# Altium PCB Night_light.PcbDoc
Units mil, origin at the board's own origin, x right, y up, seen from the top; angles counter-clockwise.
Board outline 2340.03 x 2371.94 mil, 2 copper layers (Top Layer, Bottom Layer); 32 components, 21 nets, 84 pads, 36 vias.
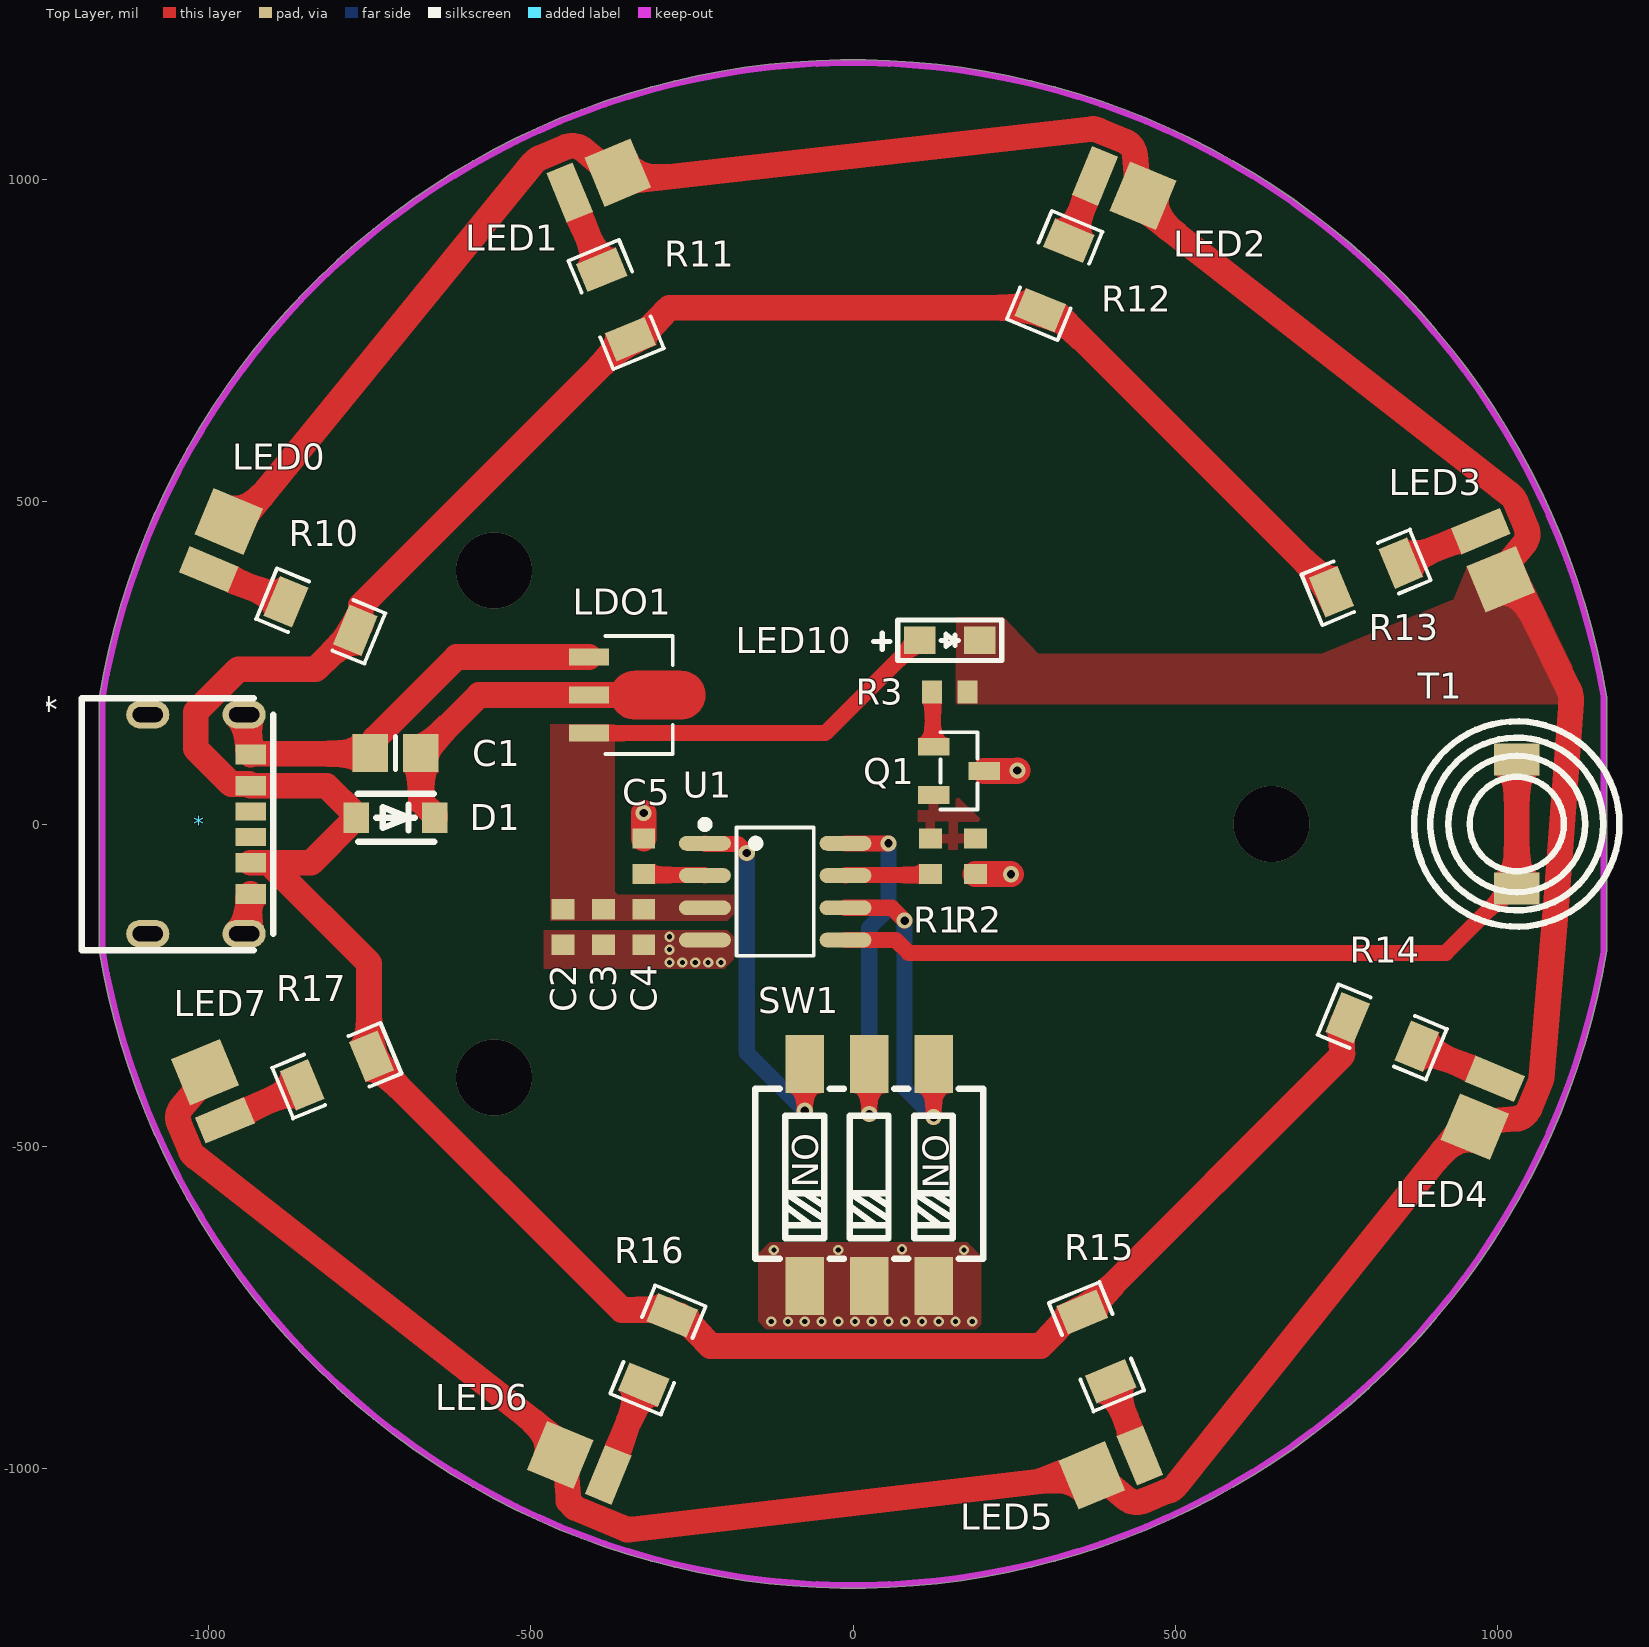
[diagram p0: Top Layer view]
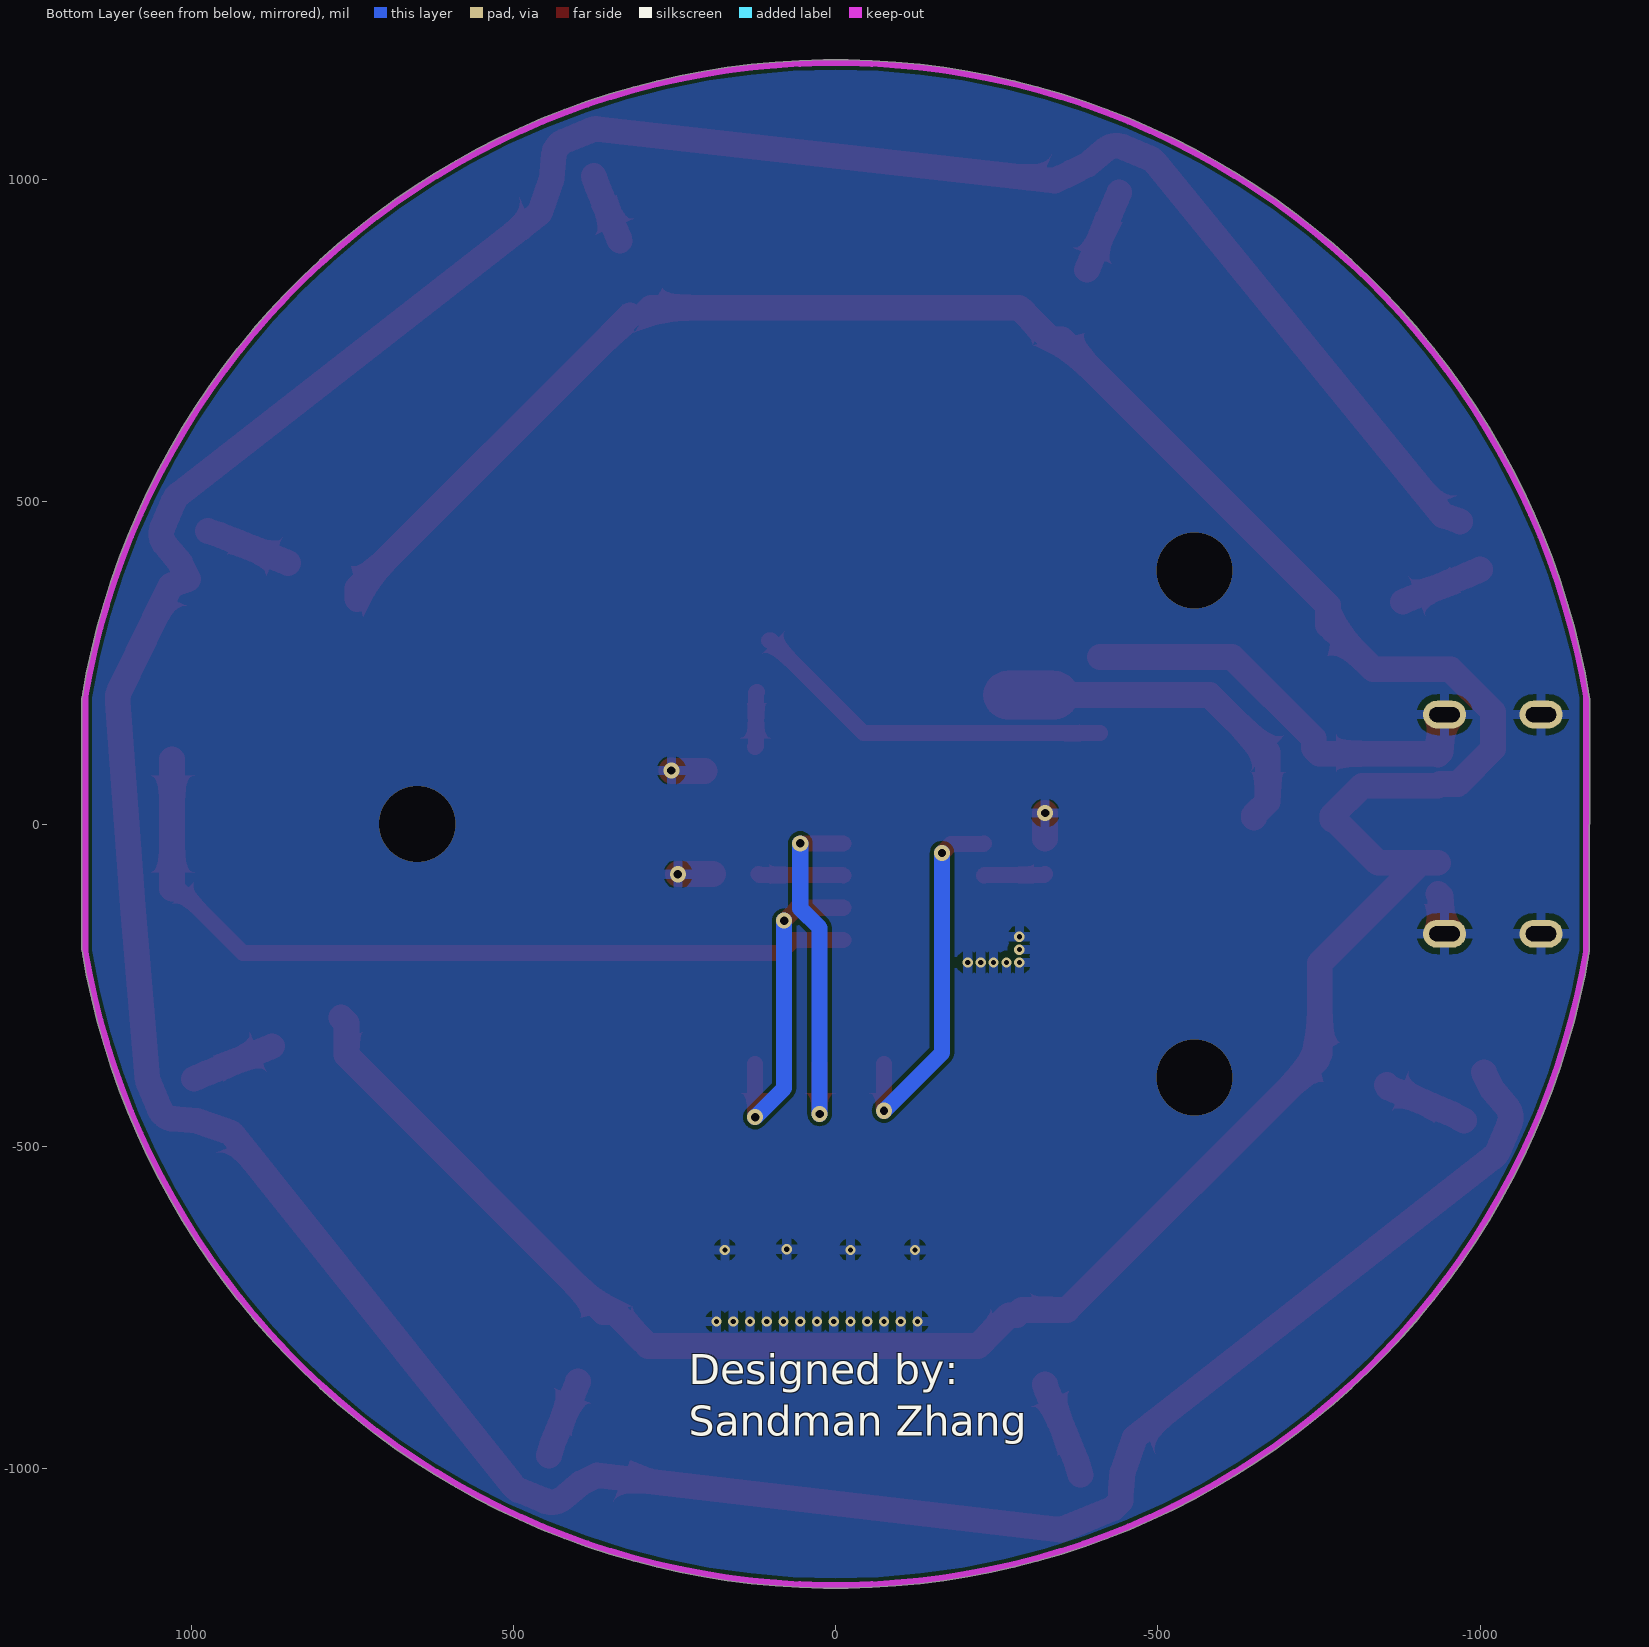
[diagram p1: Bottom Layer view, seen from below]

## Layer stack, top to bottom
Top Solder: solder mask 0.4, Solder Resist, Dk 3.5
Top Layer: signal copper 1.4
Dielectric 1: dielectric 12.6, FR-4, Dk 4.8
Bottom Layer: signal copper 1.4
Bottom Solder: solder mask 0.4, Solder Resist, Dk 3.5

## Board outline
-1169.67,-196.82 ccw(c0,0) 1169.67,-196.82 1170.02,-195 1170.02,195 1169.67,196.82 ccw(c0,0) -1169.67,196.82 -1170.01,195

## Design rules (kind name [scope] priority, off if disabled: settings)
Clearance [All] p1: gap=6 ignorepadtopadclearanceinfootprint=FALSE
HoleSize [All] p1: absolutevalues=TRUE maxlimit=200 minlimit=1 maxpercent=80.000 minpercent=20.000
MinimumSolderMaskSliver [All] p1: minsoldermaskwidth=6
PlaneConnect [All] p1: planeconnectstyle=Relief reliefexpansion=20 reliefentries=4 reliefconductorwidth=15 reliefairgap=10
PolygonConnect [All] p1: connectstyle=Relief reliefconductorwidth=15 reliefentries=4 polygonreliefangle="90 Angle" airgapwidth=10
RoutingVias [All] p1: holewidth=16 width=32 viastyle="Through Hole" minholewidth=8 minwidth=16 maxholewidth=28 maxwidth=56
SilkToSilkClearance [All] p1: silktosilkclearance=0
SilkToSolderMaskClearance [IsPad] p1: minsilkscreentomaskgap=0 clearancetoexposedcopper=TRUE
SolderMaskExpansion [All] p1: expansion=4 istentingtop=FALSE
Width Width_GND [InNet('GND')] p1: maxlimit=60 minlimit=25 preferedwidth=40 minimp=50.000000 maximp=50.000000 favimp=50.000000
Width Width_Power [InNet('+5')] p2: maxlimit=60 minlimit=25 preferedwidth=40 minimp=50.000000 maximp=50.000000 favimp=50.000000
Width Width_Power_1 [InNet('VCC')] p3: maxlimit=60 minlimit=25 preferedwidth=40 minimp=50.000000 maximp=50.000000 favimp=50.000000
Width [All] p4: maxlimit=40 minlimit=10 preferedwidth=25 minimp=50.000000 maximp=50.000000 favimp=50.000000
25 further rules are at their usual default settings.

## Components (designator, comment, footprint, x,y, rotation, side; value= is the part's Value field where it differs from the comment)
* "USB-C 6P" "USB-C 6P" -945,169.76 r270 top
C1 "Cap" 6-0805_M -710,110 r0 top value=100pF
C2 "Cap" 1608[0603] -450,-160 r90 top value=100pF
C3 "Cap" 1608[0603] -387.5,-160 r90 top value=100pF
C4 "Cap" 1608[0603] -325,-160 r90 top value=100pF
C5 "Cap" 1608[0603] -325,-50 r270 top value=100pF
D1 "Diode" SOD-123 -771.02,10 r0 top
LDO1 "7150-1" SOT-89 -410,259.05 r180 top
LED0 "2835LED" 2835LED -1000,395 r67.5 top
LED1 "2835LED" 2835LED -440,980 r22.5 top
LED2 "2835LED" 2835LED 375.43,1005.89 r337.5 top
LED3 "2835LED" 2835LED 974.11,454.57 r292.5 top
LED4 "2835LED" 2835LED 995.89,-395.43 r247.5 top
LED5 "2835LED" 2835LED 445,-980 r202.5 top
LED6 "2835LED" 2835LED -380,-1010 r157.5 top
LED7 "2835LED" 2835LED -975,-460 r112.5 top
LED10 "LED" LED 150,285 r180 top
Q1 "NPN" SOT23 125,119.8 r180 top
R1 "101" 1608[0603] 120,-50 r90 top
R2 "103" 1608[0603] 190,-50 r90 top
R3 "102" 1608[0603] 150,205 r180 top
R10 "Res" R1206 -826.21,322.72 r157.5 top
R11 "Res" R1206 -367.72,806.21 r112.5 top
R12 "Res" R1206 312.72,851.21 r67.5 top
R13 "Res" R1206 796.21,382.72 r22.5 top
R14 "Res" R1206 821.21,-322.72 r337.5 top
R15 "Res" R1206 377.72,-811.21 r292.5 top
R16 "Res" R1206 -302.72,-816.21 r247.5 top
R17 "Res" R1206 -801.21,-382.72 r202.5 top
SW1 "SD03H0SB" SW-SMD_3 25,-545 r0 top
T1 "Touch_spring" Touch_spring2 1030,0 r90 top
U1 "LED_controller" SOP8 -230,-30 r270 top

## Footprints (in the part's own frame and the unit in brackets; to place one, negate y for a bottom-side part, rotate by r counter-clockwise, add the part's x,y. Pads: shape width x height; smd on the part's side, far side on the other; paste and mask are expansions set on the pad)
6-0805_M [mm] "Chip Resistor, Body 2.0x1.2mm, IPC Low Density"
  rect 1.4x1.5 smd: 1(-1,0) 2(1,0)
  silkscreen extent 0,-0.65 0,0.65, body extent -1.07,-0.7 1.07,0.7, height 0.7
1608[0603] [mm] "Chip Capacitor, Body 1.6x0.8mm, IPC High Density"
  rect 0.8x0.9 smd: 1(-0.7,0) 2(0.7,0)
  body extent -0.87,-0.48 0.87,0.48, height 1.3
2835LED [mm]
  rect 1.12x2.1 smd: 1(0,0)
  rect 1.98x2.1 smd: 2(2.05,0)
LED [mil]
  rect 49x43 smd: 1(46.26,0) 2(-46.26,0)
  silkscreen extent -81,-31 118,31
R1206 [mil]
  rect 47.54x66.97 smd: 1(-58.22,0) 2(58.22,0)
  silkscreen extent -91,-42 91,42
SOD-123 [mm]
  rect 1x1.2 smd: 1(0,0) 2(3.1,0)
  silkscreen extent 0.06,-0.95 3.07,0.93
SOP8 [mm]
  oval 0.588x2.045 smd: 1(0,0) 2(1.27,0) 3(2.54,0) 4(3.81,0) 5(3.81,5.545) 6(2.54,5.545) 7(1.27,5.545) 8(0,5.545)
  silkscreen extent -0.9,-0.15 4.43,4.29
SOT23 [mm]
  rect 1.25x0.7 smd: 1(0,0) 2(0,1.9) 3(-2,0.95)
  silkscreen extent -1.73,-0.58 -0.27,2.48
SOT-89 [mm]
  rect 1.575x0.672 smd: 1(0,0) 2(0,1.5) 3(0,3)
  Top Layer region: -3.644,2.448 -1.79,2.448 -1.745,2.447 -1.701,2.444 -1.657,2.439 -1.613,2.432 -1.569,2.422 -1.526,2.411 -1.484,2.398 -1.442,2.382 -1.401,2.365 -1.361,2.346 -1.321,2.325 -1.283,2.302 -1.246,2.277 -1.21,2.251 -1.176,2.223 -1.142,2.193 -1.11,2.162 -1.08,2.13 -1.051,2.096 -1.024,2.06 -0.998,2.024 -0.975,1.986 -0.953,1.947 -0.933,1.908 -0.914,1.828 0.787,1.828 0.787,1.168 -0.914,1.168 -0.933,1.089 -0.953,1.049 -0.975,1.011 -0.998,0.973 -1.024,0.936 -1.051,0.901 -1.08,0.867 -1.11,0.835 -1.142,0.803 -1.176,0.774 -1.21,0.746 -1.246,0.719 -1.283,0.695 -1.321,0.672 -1.361,0.651 -1.401,0.632 -1.442,0.614 -1.484,0.599 -1.526,0.586 -1.569,0.574 -1.613,0.565 -1.657,0.558 -1.701,0.553 -1.745,0.549 -1.79,0.548 -3.644,0.548 -3.689,0.549 -3.733,0.553 -3.777,0.558 -3.821,0.565 -3.865,0.574 -3.908,0.586 -3.95,0.599 -3.992,0.614 -4.033,0.632 -4.073,0.651 -4.113,0.672 -4.151,0.695 -4.188,0.719 -4.224,0.746 -4.259,0.774 -4.292,0.803 -4.324,0.835 -4.354,0.867 -4.383,0.901 -4.41,0.936 -4.436,0.973 -4.459,1.011 -4.481,1.049 -4.501,1.089 -4.52,1.13 -4.536,1.171 -4.55,1.213 -4.563,1.256 -4.573,1.299 -4.581,1.343 -4.588,1.387 -4.592,1.432 -4.594,1.476 -4.594,1.521 -4.592,1.565 -4.588,1.609 -4.581,1.654 -4.573,1.697 -4.563,1.741 -4.55,1.783 -4.536,1.826 -4.52,1.867 -4.501,1.908 -4.481,1.947 -4.459,1.986 -4.436,2.024 -4.41,2.06 -4.383,2.096 -4.354,2.13 -4.324,2.162 -4.292,2.193 -4.259,2.223 -4.224,2.251 -4.188,2.277 -4.151,2.302 -4.113,2.325 -4.073,2.346 -4.033,2.365 -3.992,2.382 -3.95,2.398 -3.908,2.411 -3.865,2.422 -3.821,2.432 -3.777,2.439 -3.733,2.444 -3.689,2.447
  silkscreen extent -3.31,-0.83 -0.65,3.83
SW-SMD_3 [mil]
  rect 60x90 smd: 1(-99.99,-172.25) 2(0.01,-172.25) 3(100.01,-172.25) 4(100.01,172.25) 5(0.01,172.25) 6(-99.99,172.25)
  silkscreen extent -177,-130 177,134
Touch_spring2 [mil]
  rect 50x70 smd: 1(-100,0) 1(100,0)
  silkscreen extent -159,-159 159,159
"USB-C 6P" [mm]
  rect 0.8x1.2 smd: 1(1.57,0.254) 6(7.07,0.254)
  rect 0.76x1.2 smd: 2(2.8,0.254) 5(5.84,0.254)
  rect 0.7x1.2 smd: 3(3.82,0.254) 4(4.82,0.254)
  oval 1.1x1.7 hole 1.2 slot 0.6 at 0 deg: 7(0,0) 8(0,-3.8) 9(8.64,0) 10(8.64,-3.8)
  silkscreen extent -0.65,-6.4 9.29,1.14, body extent -0.13,-6.62 8.81,1.28, height 3.19

## Part data
C1 C2 C3 C4 C5: "Capacitor", LatestRevisionDate=17-Jul-2002, LatestRevisionNote="Re-released for DXP Platform.", PackageDescription="Radial Cap, Thru-Hole; 2 Leads; 0.3 in Pin Spacing", PackageReference=RAD-0.3, Published=8-Jun-2000, Publisher="Altium Limited"
D1: "Default Diode", Code_JEDEC=DO-214-AB, LatestRevisionDate=17-Jul-2002, LatestRevisionNote="Re-released for DXP Platform.", PackageDescription="DO-214-AB/SMC; 2 C-Bend Leads; Body 7.9 x 5.9 mm, inc. leads (LxW)", PackageReference=SMC, PackageVersion=Sep-1996, Published=8-Jun-2000, Publisher="Altium Limited"
LED10: "Typical INFRARED GaAs LED", LatestRevisionDate=08-Jul-2005, LatestRevisionNote="Mech Layer 1 removed.", PackageDescription="LED; 2 Leads", PackageReference=LED-0, Published=8-Jun-2000, Publisher="Altium Limited"
Q1: "NPN Bipolar Transistor", Code_JEDEC=TO-226-AA, LatestRevisionDate=17-Jul-2002, LatestRevisionNote="Re-released for DXP Platform.", PackageDescription="TO, Flat Index; 3 In-Line, Axial Leads; Body Dia. 4.8mm; Leads 0.55 x 0.51 mm (max)", PackageReference=TO-226-AA, Published=8-Jun-2000, Publisher="Altium Limited"
R1 R2 R3: library part Res, "Resistor", LatestRevisionDate=17-Jul-2002, LatestRevisionNote="Re-released for DXP Platform.", PackageDescription="Axial Device, Thru-Hole; 2 Leads; 0.4 in Pin Spacing", PackageReference=AXIAL-0.4, Published=8-Jun-2000, Publisher="Altium Limited"
R10 R11 R12 R13 R14 R15 R16 R17: "Resistor", LatestRevisionDate=17-Jul-2002, LatestRevisionNote="Re-released for DXP Platform.", PackageDescription="Axial Device, Thru-Hole; 2 Leads; 0.4 in Pin Spacing", PackageReference=AXIAL-0.4, Published=8-Jun-2000, Publisher="Altium Limited"
SW1: library part "SW Dial-3"

## Via types
v1: diameter 16, hole 8, Top Layer to Bottom Layer, 24 vias
v2: diameter 25, hole 13, Top Layer to Bottom Layer, 9 vias
v3: diameter 118.11, hole 118.11, Top Layer to Bottom Layer, 3 vias

## Nets (pads, with @x,y where several pads share a name; then routed paths per layer and width w, separated by ;. In a path a pad name is that pad's centre, name@x,y a point inside that pad or via, vN(x,y) a via of type N, cw(c..) or ccw(c..) an arc to the next point about the centre after c; other vN are vias at no path point)
+5: C2.2 C3.2 C4.2 LDO1.3 LED10.1 U1.3 | length 573.4
  Top Layer w25: LDO1.3 -43.31,140.95 100.74,285 LED10.1
Ctrl: R1.1 U1.7 | length 132.7
  Top Layer w25: U1.7 -10.77,-79.07 118.48,-79.07 R1.1
GND: *.1 *.6 *.7 *.8 *.9 *.10 C1.1 C2.1 C3.1 C4.1 C5.1 LDO1.1 Q1.3 R2.1 SW1.1 SW1.2 SW1.3 U1.4 | length 880.2
  Top Layer w40: *.9 -940.15,-170.39 -938.62,-168.87 -938.62,-112.2 *.6 ; *.7 -940.15,169.76 -938.62,168.24 -938.62,111.57 *.1 -933.98,108.98 -750.39,108.98 C1.1 -741.81,117.56 -741.81,132.68 -615.43,259.05 LDO1.1 ; C5.1 v2(-325,17) ; R2.1 244.56,-77.56 v2(245,-78) ; Q1.3 254.4,82.4 v2(255,83)
  other v1: -127,-772 -101,-772 -75,-772 -49,-772 -23,-772 3,-772 29,-772 55,-772 81,-772 107,-772 133,-772 159,-772 185,-772 -123,-661 -23,-661 172,-661 76,-660 -285,-215 -265,-215 -245,-215 -225,-215 -205,-215 -285,-195 -285,-175
  other v3: -557,-393.7 649.5,0 -557,393.7
IN+: C1.2 D1.2 LDO1.2 | length 478
  Top Layer w40: D1.2 -648.98,13.31 -670.63,34.96 C1.2 -670.63,111.97 -663.07,119.53 -661.1,119.53 -580.63,200 LDO1.2 -340,200
LED_ctrl: LED0.2 LED1.2 LED2.2 LED3.2 LED4.2 LED5.2 LED6.2 LED7.2 LED10.2 R3.1 | length 6289.1
  Top Layer w40: LED7.2 -1018.34,-411.13 -1041.53,-438.72 ccw(c-1021.63,-455.45) -1045.65,-465.4 -1028.78,-506.14 ccw(c-1004.75,-496.19) -1020.77,-516.67 -463.93,-952.14 LED6.2 -445.2,-1006.09 -442.83,-1033.52 -442.19,-1040.88 -442.19,-1050.52 -430.92,-1061.8 -350.76,-1095 -347.54,-1095 350.85,-1013.18 LED5.2 396.13,-1023.34 423.72,-1046.53 ccw(c440.45,-1026.63) 450.39,-1050.65 485.03,-1036.3 492.6,-1033.78 495.92,-1031.8 501.62,-1026.09 503.73,-1023.2 938.02,-479.37 LED4.2 991.98,-460.63 1027.88,-457.53 ccw(c1025.64,-431.62) 1049.66,-441.57 1066.54,-400.84 ccw(c1042.51,-390.89) 1068.42,-393.08 1090.91,-127.19 ccw(c1065,-125) 1090.93,-126.92 1114.35,188.94 ccw(c1074.46,191.9) 1110.46,209.33 1110.43,209.4 1031.98,370.63 LED3.2 1017.45,405.7 1040.64,433.28 ccw(c1020.74,450.02) 1044.76,459.97 1027.89,500.7 ccw(c1003.87,490.75) 1019.85,511.26 459.37,948.02 LED2.2 440.63,1001.98 437.53,1037.88 ccw(c411.62,1035.64) 421.57,1059.66 380.84,1076.54 ccw(c370.89,1052.51) 367.97,1078.35 -339.74,998.43 LED1.2 -391.13,1023.34 -418.72,1046.53 ccw(c-435.45,1026.63) -445.4,1050.65 -486.14,1033.78 ccw(c-476.19,1009.75) -496.35,1026.18 -942.14,478.93 LED0.2
NetC5_2: C5.2 U1.2 | length 96
  Top Layer w25: C5.2 -323.48,-79.07 -230.93,-79.07 U1.2
NetLED0_1: LED0.1 R10.2 | length 130
  Top Layer w40: LED0.1 -980.39,386.59 -883.48,346.45 R10.2
NetLED1_1: LED1.1 R11.2 | length 130
  Top Layer w40: LED1.1 -431.59,960.39 -391.45,863.48 R11.2
NetLED2_1: LED2.1 R12.2 | length 108.7
  Top Layer w40: R12.2 336.4,908.5 368.38,985.71 LED2.1
NetLED3_1: LED3.1 R13.2 | length 133.7
  Top Layer w40: R13.2 853.5,406.4 953.77,447.93 LED3.1
NetLED4_1: LED4.1 R14.2 | length 131
  Top Layer w40: R14.2 878.48,-346.45 976.3,-386.97 LED4.1
NetLED5_1: LED5.1 R15.2 | length 123.6
  Top Layer w40: R15.2 401.08,-868.63 438.72,-959.5 LED5.1
NetLED6_1: LED6.1 R16.2 | length 150.6
  Top Layer w40: LED6.1 -373.72,-989.5 -325.78,-873.76 R16.2
NetLED7_1: LED7.1 R17.2 | length 133
  Top Layer w40: LED7.1 -956.07,-449.94 -857.39,-409.07 R17.2
NetQ1_1: Q1.1 R3.2 | length 86.3
  Top Layer w25: R3.2 123.72,203.72 123.72,121.08 Q1.1
NetQ1_2: Q1.2 R1.2 R2.2
SB1: SW1.6 U1.1 | length 580.7
  Top Layer w25: U1.1 -229.07,-30.93 -179.07,-30.93 v2(-165,-45) ; v2(-75,-445) SW1.6
  Bottom Layer w25: v2(-165,-45) -165,-355 v2(-75,-445)
SB2: SW1.5 U1.8 | length 576.4
  Top Layer w25: U1.8 v2(55,-30) ; v2(25,-450) SW1.5@25,-372.75
  Bottom Layer w25: v2(25,-450) 25,-161.16 55,-131.16 v2(55,-30)
SB3: SW1.4 U1.6 | length 505.9
  Top Layer w25: U1.6 60,-130 v2(80,-150) ; v2(125,-455) SW1.4
  Bottom Layer w25: v2(80,-150) 80,-410 v2(125,-455)
Touch: T1.1 U1.5 | length 1291.4
  Top Layer w25: U1.5 66.16,-180 86.16,-200 920,-200 1020,-100 T1.1@1030,-100
  Top Layer w40: T1.1@1030,-100 T1.1@1030,100
VCC: *.2 *.5 D1.1 R10.1 R11.1 R12.1 R13.1 R14.1 R15.1 R16.1 R17.1 | length 5060.3
  Top Layer w40: *.5 -904.86,-60.16 -841.18,-60.16 -774.64,6.38 -771.34,6.38 -771.02,6.69 -771.02,13.31 -817.24,59.53 *.2 -937.43,61.95 -965.14,61.95 -1020,116.81 -1020,173.97 -953.97,240 -834.09,240 -773.64,300.44 R10.1 -764.13,308.74 -764.13,339 -350.7,752.43 R11.1 -333.71,752.43 -284.99,801.14 286.72,801.14 R12.1 ; -904.86,-62.58 -751.14,-216.3 -751.14,-356.72 R17.1 -747.43,-365.7 -359,-754.13 -288.74,-754.13 R16.1 -268.71,-762.43 -221.13,-810 291.13,-810 343.71,-757.43 R15.1 360.7,-757.43 759.13,-359 759.13,-308.74 R14.1 ; R12.1@319,789.13 742.43,365.7 R13.1 R13.1@742.43,348.71
pads on no net: *.3 *.4

## Polygon pours and split planes (outlines as drawn)
NetQ1_2 on Top Layer "NETQ1_2_L01_P000" (solid, remove dead copper, pour order 0): 100,60 100,-40 210,-40 210,-5 150,55 150,60
LED_ctrl on Top Layer "LED_CTRL_L01_P009" (solid, pour order 9): 159,185 160,321 234,321 287,264 729,265 932,349 953,400 1005,422 1040,402 1117,243 1095,186
GND on Top Layer "GND_L01_P006" (solid, remove dead copper, pour order 6): -147,-667 -129,-649 177,-649 199,-671 199,-776 185,-790 -129,-790 -147,-772
GND on Top Layer "GND_L01_P002" (solid, remove dead copper, pour order 2): -195,-165 -480,-165 -480,-225 -200,-225 -185,-210 -185,-175
+5 on Top Layer "+5_L01_P001" (solid, remove dead copper, pour order 1): -370,155 -370,-105 -365,-110 -185,-110 -185,-140 -195,-150 -470,-150 -470,155
GND on Bottom Layer "GND_L02_P005" (solid, remove dead copper, pour order 5): -1169.67,-196.82 ccw(c0,0) 1169.67,-196.82 1170.02,-195 1170.02,195 1169.67,196.82 ccw(c0,0) -1169.67,196.82 -1170.01,195

## Keep-outs
Keep-Out Layer:
  lines w10: -1165.31,-195.05 ccw(c0,0) 1165.31,-195.05 ; -1165.31,195.05 cw(c0,0) 1165.31,195.05 ; -1165,-195 -1165,195 ; 1165,-195 1165,195

## Silkscreen, mask and mechanical layers (free items; w line width, h text height)
Bottom Overlay:
  text "Designed by:  / Sandman Zhang" at 228,-965 h80
Mechanical 1:
  lines w10: -1165.17,-193.37 ccw(c0,0) 1164.9,-194.98 ; -1165,-195 -1165,195 ; -1164.9,194.98 cw(c0,0) 1164.9,194.98 ; 1165,-195 1165,195

## Text inside footprints (layer, text, board x,y; h text height)
SW1: Top Overlay "ON" at -94.7,-479.75 h40 r270; Top Overlay "ON" at 108.3,-481.75 h40 r270